# Altium PCB servo_header_board.PcbDoc
Units mm, origin at the board's own origin, x right, y up, seen from the top; angles counter-clockwise.
Board outline 52.07 x 27.94 mm, 2 copper layers (Top Layer, Bottom Layer); 13 components, 13 nets, 54 pads, 0 vias.
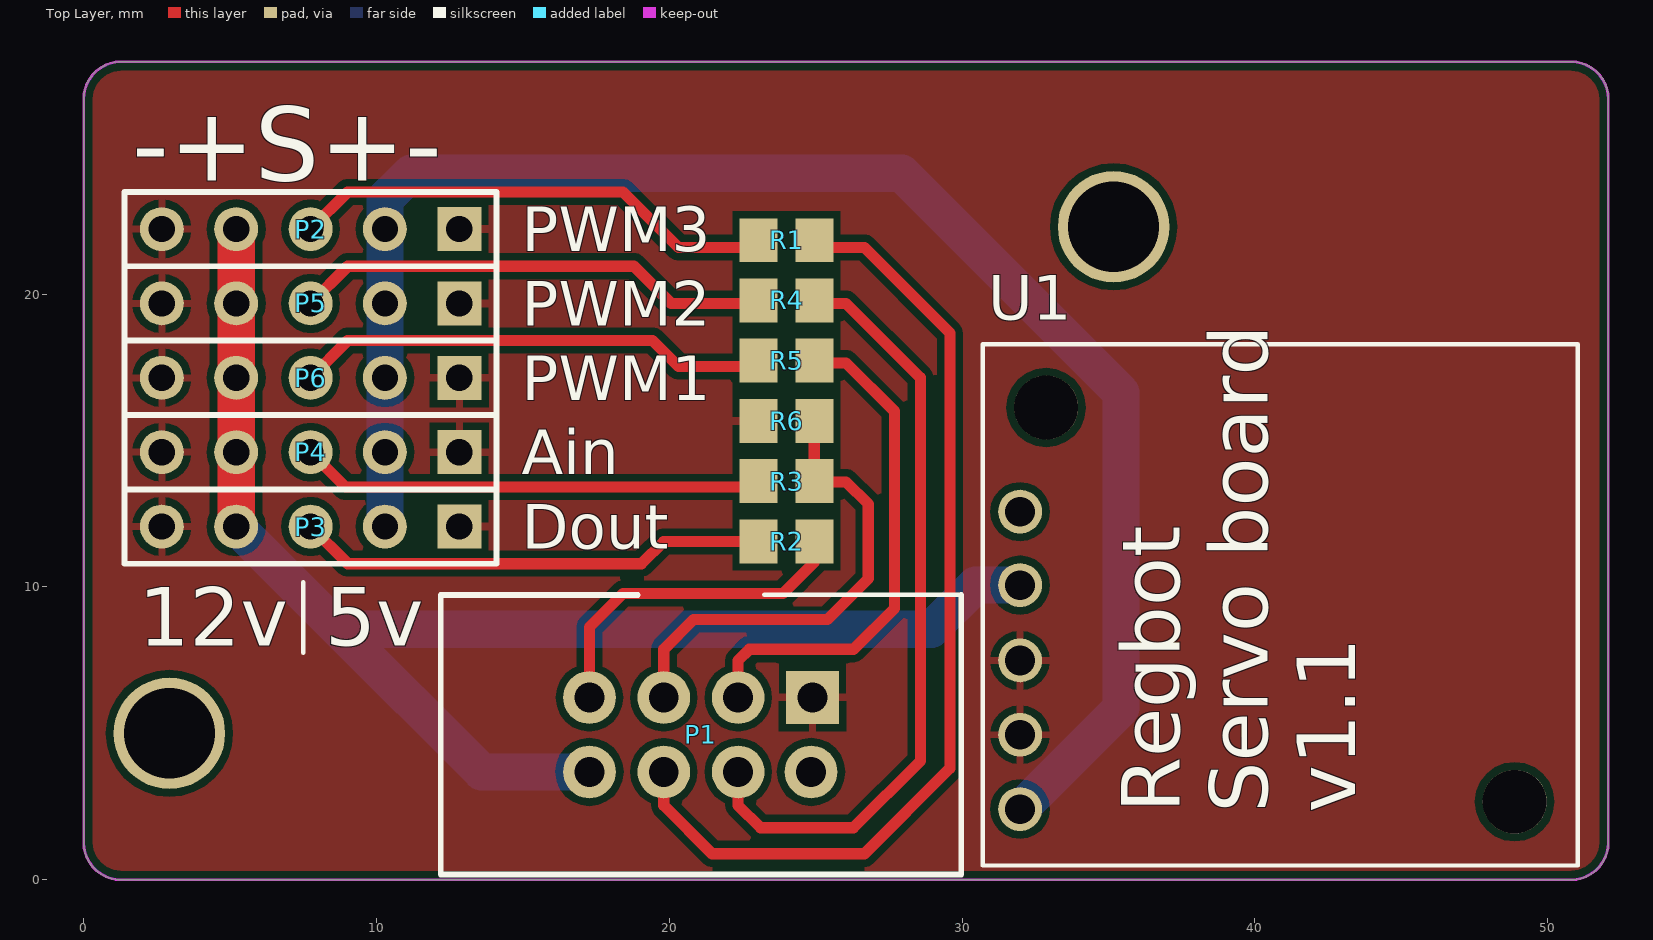
[diagram p0: Top Layer view]
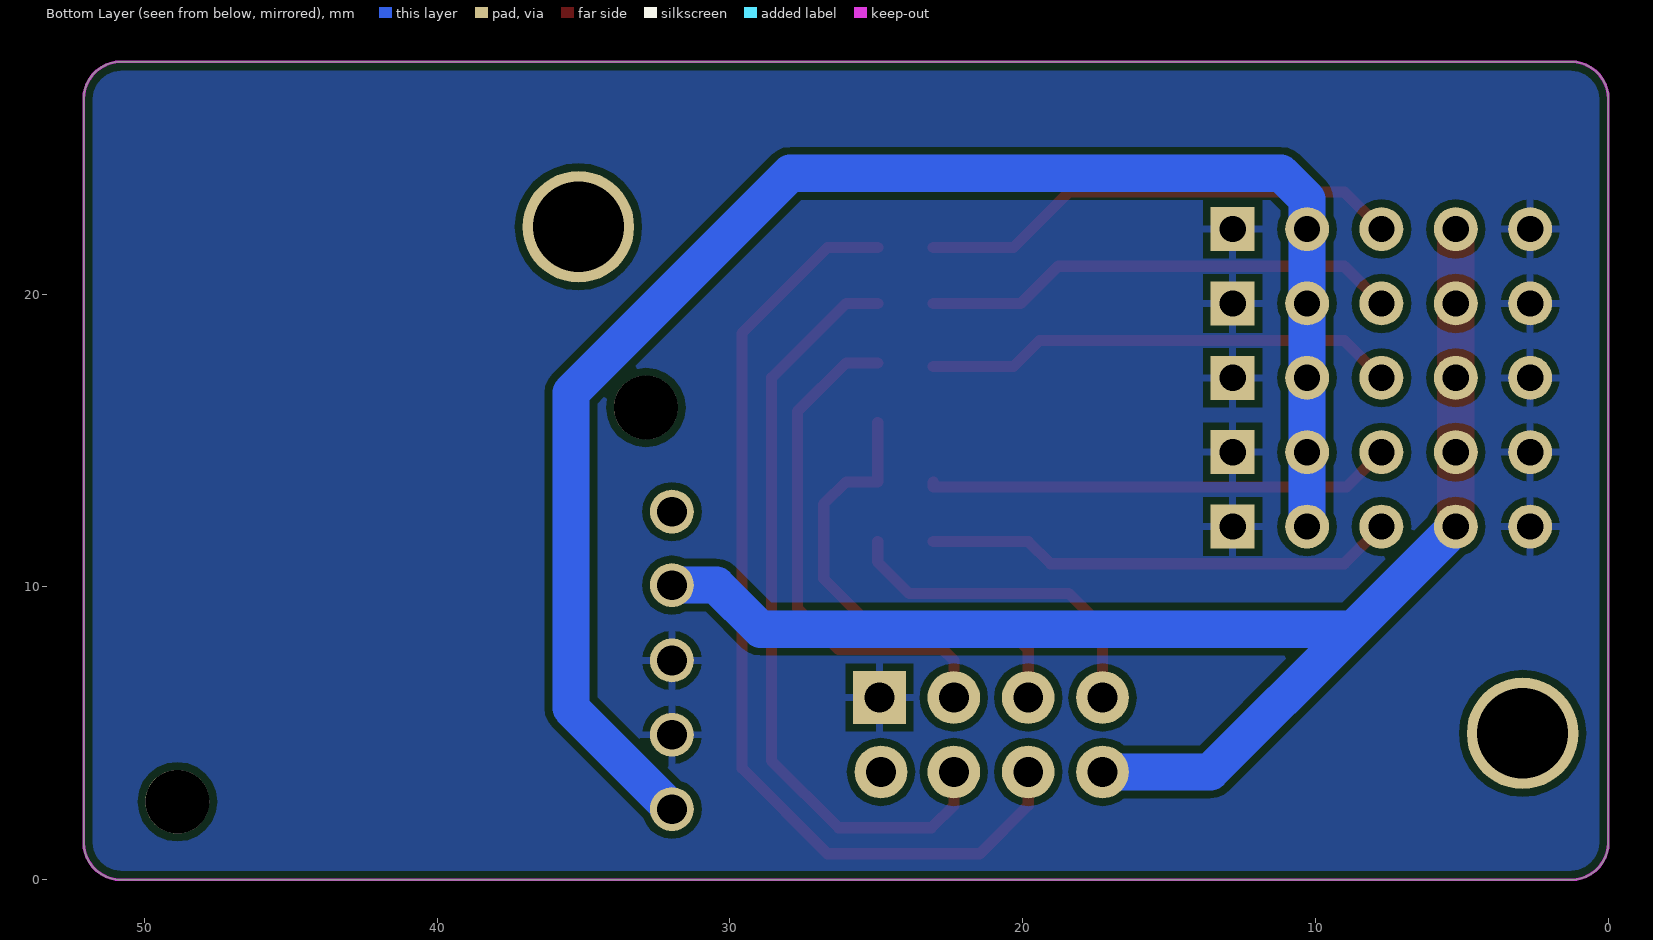
[diagram p1: Bottom Layer view, seen from below]

## Layer stack, top to bottom
Top Solder: solder mask 0.0102, Solder Resist, Dk 3.5
Top Layer: signal copper 0.0356
Dielectric 1: dielectric 0.32, FR-4, Dk 4.8
Bottom Layer: signal copper 0.0356
Bottom Solder: solder mask 0.0102, Solder Resist, Dk 3.5

## Board outline
0,6.35 0,26.67 cw(c1.27,26.67) 1.27,27.94 50.8,27.94 cw(c50.8,26.67) 52.07,26.67 52.07,20.447 52.07,11.43 52.07,1.27 cw(c50.8,1.27) 50.8,0 1.27,0 cw(c1.27,1.27) 0,1.27

## Design rules (kind name [scope] priority, off if disabled: settings)
Clearance [All] p1: gap=0.254
HoleSize [All] p1: absolutevalues=TRUE maxlimit=4 minlimit=0.025 maxpercent=80.000 minpercent=20.000
PolygonConnect [All] p1: connectstyle=Relief reliefconductorwidth=0.254 reliefentries=4 polygonreliefangle="90 Angle" airgapwidth=0.254
RoutingVias [All] p1: holewidth=0.711 width=1.27 viastyle="Through Hole" minholewidth=0.711 minwidth=1.27 maxholewidth=0.711 maxwidth=1.27
SolderMaskExpansion [All] p1: expansion=0.102
Width Width_power [InNetClass('PowerHigh')] p1: maxlimit=2.54 minlimit=0.508 preferedwidth=1.27
Width [All] p2: maxlimit=1.27 minlimit=0.254 preferedwidth=0.381
29 further rules are at their usual default settings.

## Classes and differential pairs
net class PowerHigh: +5V GND VMOT

## Components (designator, comment, footprint, x,y, rotation, side; value= is the part's Value field where it differs from the comment)
P1 "Servo head" HOUSED8 24.892,6.223 r270 top
P2 "PWM3" HDR1X5 12.827,22.225 r180 top
P3 "Dout" HDR1X5 12.827,12.065 r180 top
P4 "Ain" HDR1X5 12.827,14.605 r180 top
P5 "PWM2" HDR1X5 12.827,19.685 r180 top
P6 "PWM1" HDR1X5 12.827,17.145 r180 top
R1 "1k" R0805 24.003,21.844 r180 top
R2 "1k" R0805 24.003,11.557 r180 top
R3 "5k" R0805 24.003,13.614 r180 top
R4 "1k" R0805 24.003,19.787 r180 top
R5 "1k" R0805 24.003,17.729 r180 top
R6 "1k" R0805 24.003,15.672 r0 top
U1 "D24V50F5" D24V50F5-hori 30.712,18.288 r270 top

## Footprints (in the part's own frame and the unit in brackets; to place one, negate y for a bottom-side part, rotate by r counter-clockwise, add the part's x,y. Pads: shape width x height; smd on the part's side, far side on the other; paste and mask are expansions set on the pad)
D24V50F5-hori [mm]
  round 1.5 hole 1.016: EN(5.715,1.27) GND(10.795,1.27) GND(13.335,1.27) Vin(8.225,1.27) Vout(15.875,1.27)
  round 2.18 hole 2.18: ""(2.159,2.159) ""(15.621,18.161)
  silkscreen extent 0,0 17.8,20.32
HDR1X5 [mm] "Connector; Header; 5 Position"
  rect 1.5x1.5 hole 0.9: 1(0,0)
  round 1.5 hole 0.9: 2(2.54,0) 3(5.08,0) 4(7.62,0) 5(10.16,0)
  silkscreen extent -1.27,-1.27 11.43,1.27
HOUSED8 [mm]
  rect 1.8x1.8 hole 1.02: 1(0,0)
  round 1.8 hole 1.02: 2(0,-2.54) 3(0,-5.08) 4(0,-7.62) 5(2.54,-7.62) 6(2.54,-5.08) 7(2.54,-2.54) 8(2.54,-0.051)
  silkscreen extent -3.51,-12.7 6.05,5.08
R0805 [mm]
  rect 1.3x1.5 smd: 1(-0.95,0) 2(0.95,0)

## Part data
P1: library part PIN_HOUSED_8
P2 P3 P4 P5 P6: library part "Header 5", "Header, 5-Pin"
R1 R2 R3 R4 R5 R6: library part R-EU, "RESISTOR, European symbol"
U1: "Pololu 5V, 5A Step-Down Voltage Regulator"

## Free pads (board coordinates)
  round 3.81 hole 3.1: 0(2.925,5.002) 1(35.175,22.303)

## Nets (pads, with @x,y where several pads share a name; then routed paths per layer and width w, separated by ;. In a path a pad name is that pad's centre, name@x,y a point inside that pad or via, vN(x,y) a via of type N, cw(c..) or ccw(c..) an arc to the next point about the centre after c; other vN are vias at no path point)
+5V: P2.2 P3.2 P4.2 P5.2 P6.2 U1.Vout | length 55.4
  Bottom Layer w1.27: P3.2 P4.2 P6.2 P5.2 P2.2 10.287,23.241 11.176,24.13 27.94,24.13 35.433,16.637 35.433,5.864 U1.Vout
A1: P4.3 R3.2 | length 16
  Top Layer w0.381: P4.3 8.942,13.41 23.053,13.41 R3.2@23.053,13.589
A1_IN: P1.3 R3.1 R6.2 | length 16.4
  Top Layer w0.381: P1.3 19.812,7.874 20.828,8.89 25.4,8.89 26.797,10.287 26.797,12.827 26.035,13.589 24.953,13.589 R6.2@24.953,15.621
D1: P3.3 R2.2 | length 16.1
  Top Layer w0.381: P3.3 9.017,10.795 19.05,10.795 19.812,11.557 R2.2
D1_IN: P1.4 R2.1 | length 11.7
  Top Layer w0.381: P1.4 17.272,8.636 18.415,9.779 23.876,9.779 24.953,10.856 R2.1
GND: P1.1 P2.1 P2.5 P3.1 P3.5 P4.1 P4.5 P5.1 P5.5 P6.1 P6.5 R6.1 U1.GND
PWM1: P6.3 R5.2 | length 16.2
  Top Layer w0.381: P6.3 9.017,18.415 19.431,18.415 20.32,17.526 R5.2@23.053,17.526
PWM1_IN: P1.2 R5.1 | length 17.5
  Top Layer w0.381: P1.2 22.352,7.493 22.733,7.874 26.289,7.874 27.686,9.271 27.686,16.002 26.035,17.653 R5.1@24.953,17.653
PWM2: P5.3 R4.2 | length 16.4
  Top Layer w0.381: P5.3 9.017,20.955 18.796,20.955 20.066,19.685 R4.2@23.053,19.685
PWM2_IN: P1.7 R4.1 | length 26.4
  Top Layer w0.381: P1.7 22.352,2.54 23.114,1.778 26.289,1.778 28.575,4.064 28.575,17.145 26.035,19.685 R4.1@24.953,19.685
PWM3: P2.3 R1.2 | length 16.6
  Top Layer w0.381: P2.3 9.017,23.495 18.415,23.495 20.32,21.59 R1.2@23.053,21.59
PWM3_IN: P1.6 R1.1 | length 33.5
  Top Layer w0.381: P1.6 19.812,2.54 21.463,0.889 26.67,0.889 29.591,3.81 29.591,18.669 26.67,21.59 R1.1@24.953,21.59
VMOT: P1.5 P2.4 P3.4 P4.4 P5.4 P6.4 U1.Vin | length 49.6
  Top Layer w1.27: P3.4 P4.4 P6.4 P5.4 P2.4
  Bottom Layer w1.27: P3.4 8.712,8.56 ; P1.5 13.589,3.683 8.712,8.56 ; U1.Vin 30.459,10.063 28.956,8.56 8.712,8.56
pads on no net: P1.8 U1. U1.EN

## Polygon pours and split planes (outlines as drawn)
GND on Bottom Layer "BottomLayer-GND" (solid, pour order 4): 0.254,0.254 51.816,0.254 51.816,27.686 0.254,27.686
GND on Top Layer "TopLayer-GND" (solid, pour order 8): 0.254,0.254 51.816,0.254 51.816,27.686 0.254,27.686

## Keep-outs
Keep-Out Layer:
  lines w0.1: 0,24.765 0,6.35 ; 0,1.27 ccw(c1.27,1.27) 1.27,0 50.8,0 ccw(c50.8,1.27) 52.07,1.27 52.07,26.67 ccw(c50.8,26.67) 50.8,27.94 1.27,27.94 ccw(c1.27,26.67) 0,26.67 0,6.35 ; 0,1.27 0,6.35 ; 0,1.27 0,6.35

## Silkscreen, mask and mechanical layers (free items; w line width, h text height)
Top Overlay:
  lines w0.152: 7.493,7.76 7.493,10.16
  text "-+S+-" at 1.651,23.876 h2.54
  text "12v" at 1.877,8 h2
  text "5v" at 8.255,8.001 h2
  text "Regbot / Servo board / v1.1" at 43.434,2.286 h2 r90